# Altium PCB PCB2.PcbDoc
Units mm, origin at the board's own origin, x right, y up, seen from the top; angles counter-clockwise.
Board outline 41 x 58.5 mm, 2 copper layers (Top Layer, Bottom Layer); 36 components, 22 nets, 143 pads, 0 vias.
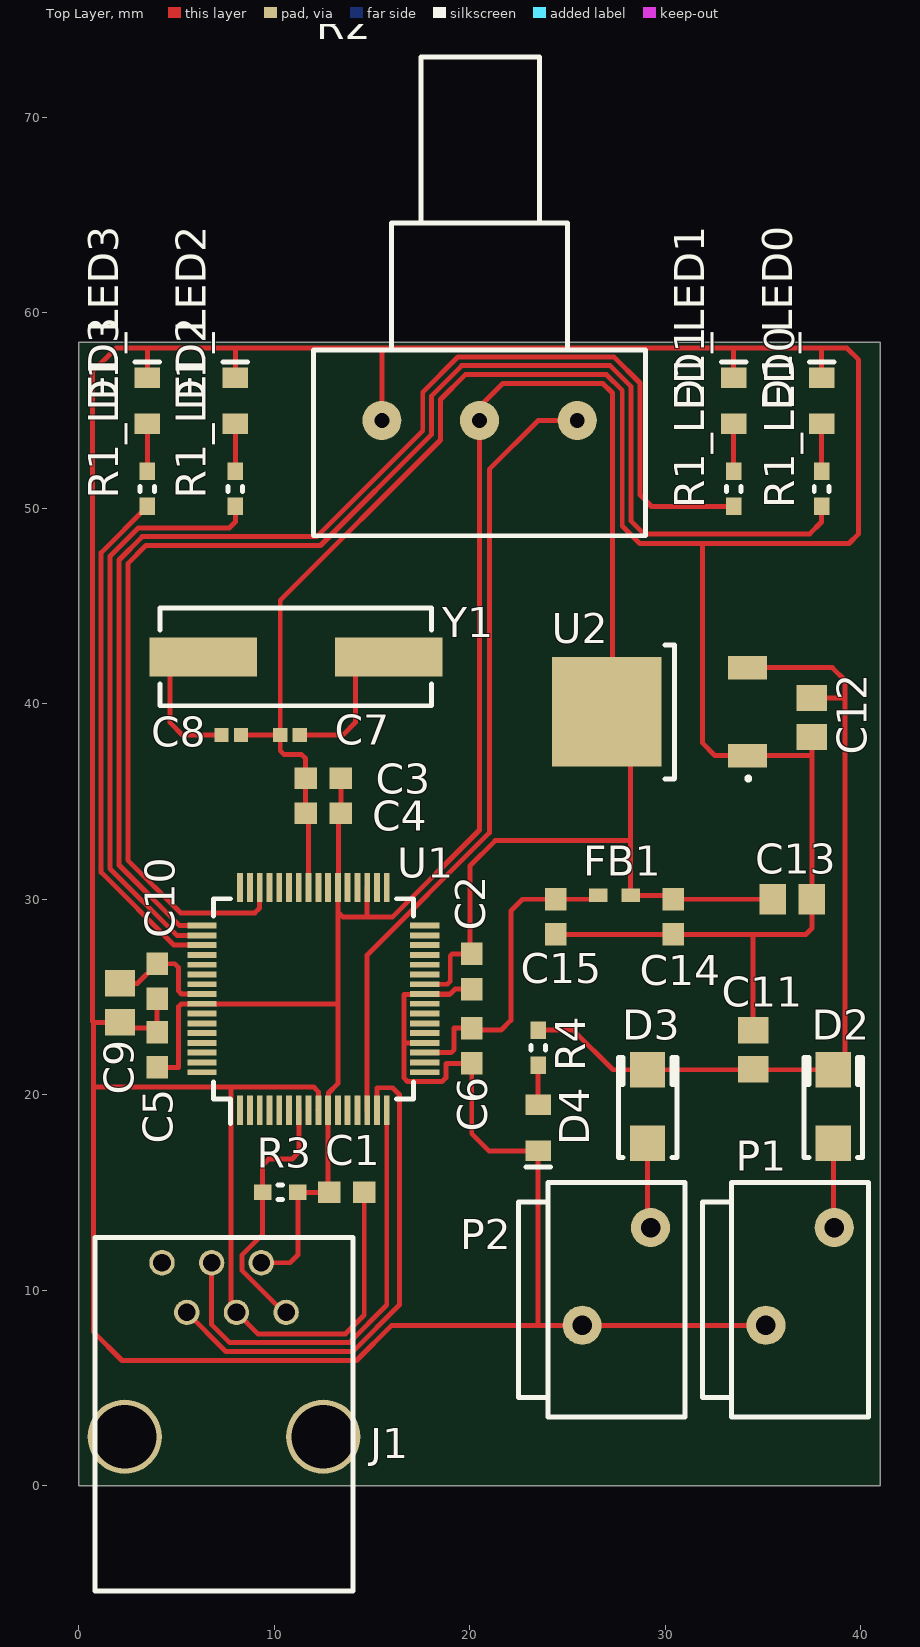
[diagram p0: Top Layer view]
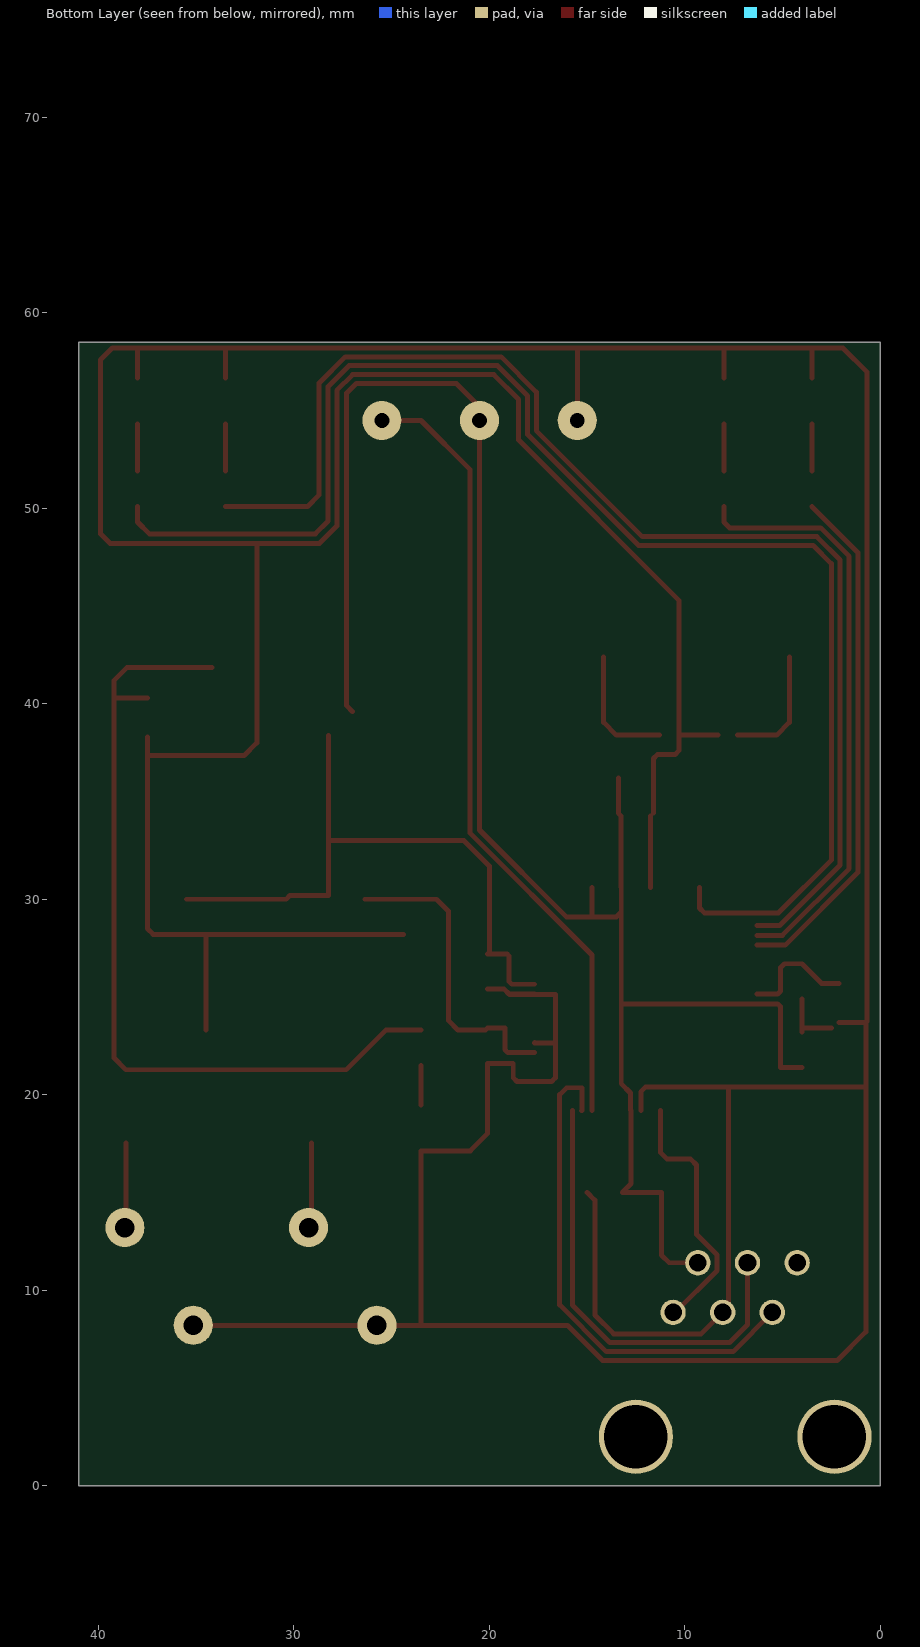
[diagram p1: Bottom Layer view, seen from below]

## Layer stack, top to bottom
Top Solder: solder mask 0.0102, Solder Resist, Dk 3.5
Top Layer: signal copper 0.0356
Dielectric 1: dielectric 0.32, FR-4, Dk 4.8
Bottom Layer: signal copper 0.0356
Bottom Solder: solder mask 0.0102, Solder Resist, Dk 3.5

## Board outline
0,0 41,0 41,58.5 0,58.5

## Design rules (kind name [scope] priority, off if disabled: settings)
Clearance [All] p1: gap=0.2
HoleSize [All] p1: absolutevalues=TRUE maxlimit=2.54 minlimit=0.3 maxpercent=80.000 minpercent=20.000
PolygonConnect [All] p1: connectstyle=Relief reliefconductorwidth=0.254 reliefentries=4 polygonreliefangle="90 Angle" airgapwidth=0.254
RoutingVias [All] p1: holewidth=0.711 width=1.27 viastyle="Through Hole" minholewidth=0.3 minwidth=0.7 maxholewidth=0.711 maxwidth=1.27
SolderMaskExpansion [All] p1: expansion=0.102
UnpouredPolygon [All] p1: allowunpoured=FALSE
Width [All] p1: maxlimit=0.254 minlimit=0.2 preferedwidth=0.2
28 further rules are at their usual default settings.

## Classes and differential pairs
component class "Components Class 1": C8 U1
channel class LED: LED0 LED1 LED2 LED3
net class LED[0..3]: LED0 LED1 LED2 LED3
component class POWER: C11 C12 C13 C14 C15 D2 D3 D4 FB1 P1 P2 R4 U2
component class PIC: C1 C2 C3 C4 C5 C6 C7 C8 C9 C10 J1 R3 U1 Y1
component class LED3: D1_LED3 R1_LED3
component class LED2: D1_LED2 R1_LED2
component class LED1: D1_LED1 R1_LED1
component class LED0: D1_LED0 R1_LED0

## Components (designator, comment, footprint, x,y, rotation, side; value= is the part's Value field where it differs from the comment)
C1 "100nF" CAPC1608N 13.7,15 r180 top
C2 "100nF" CAPC1608N 20.1,26.3 r90 top
C3 "100nF" CAPC1608N 12.5,36.2 r0 top
C4 "100nF" CAPC1608N 12.5,34.4 r0 top
C5 "100nF" CAPC1608N 4,22.3 r270 top
C6 "100nF" CAPC1608N 20.1,22.5 r90 top
C7 "20pF" CAPC1005N 10.8,38.4 r180 top
C8 "20pF" CAPC1005N 7.8,38.4 r0 top
C9 "10uF" CAPC2012N 2.1,24.7 r90 top
C10 "1uF" CAPC1608N 4,25.8 r90 top
C11 "10uF" CAPC2012N 34.5,22.3 r270 top
C12 "10uF" CAPC2012N 37.5,39.3 r90 top
C13 "10uF" CAPC2012N 36.5,30 r180 top
C14 "1uF" CAPC1608N 30.4,29.1 r90 top
C15 "100nF" CAPC1608N 24.4,29.1 r90 top
D1_LED0 "Green LED" "LED 0805" 38,55.5 r90 top (schematic designator D1)
D1_LED1 "Green LED" "LED 0805" 33.5,55.5 r90 top (schematic designator D1)
D1_LED2 "Green LED" "LED 0805" 8,55.5 r90 top (schematic designator D1)
D1_LED3 "Green LED" "LED 0805" 3.5,55.5 r90 top (schematic designator D1)
D2 "GF1A" SMA/DO-214AC_21 38.6,19.4 r90 top
D3 "GF1A" SMA/DO-214AC_21 29.1,19.4 r90 top
D4 "Green LED" "LED 0805" 23.5,18.3 r270 top
FB1 "600r" INDC1608AN 27.4,30.2 r180 top
J1 "Program / Debug" "RJ12_90  1-215876-3" 12.5,2.5 r270 top
P1 "12V Main" PHOENIX_1985195 36.9,10.7 r0 top
P2 "12V Battery" PHOENIX_1985195 27.5,10.7 r0 top
R1_LED0 "330r" RESC1608N 38,51 r270 top (schematic designator R1)
R1_LED1 "330r" RESC1608N 33.5,51 r270 top (schematic designator R1)
R1_LED2 "330r" RESC1608N 8,51 r270 top (schematic designator R1)
R1_LED3 "330r" RESC1608N 3.5,51 r270 top (schematic designator R1)
R2 "1K" PDB181-K415K-102A2 20.5,54.5 r0 top
R3 "4.7k" RESC1608N 10.3,15 r0 top
R4 "470r" RESC1608N 23.5,22.4 r90 top
U1 "PIC32MX764F128H-I/PT" QFP50P1200X1200X120-64 12,24.9 r90 top
U2 "AP1117" TD03B_N 27,39.6 r90 top
Y1 "8MHz" "HC49/4H SMX CRYSTAL" 11.1,42.4 r0 top

## Footprints (in the part's own frame and the unit in brackets; to place one, negate y for a bottom-side part, rotate by r counter-clockwise, add the part's x,y. Pads: shape width x height; smd on the part's side, far side on the other; paste and mask are expansions set on the pad)
CAPC1005N [mm]
  rect 0.72x0.72 smd: 1(-0.5,0) 2(0.5,0)
CAPC1608N [mm]
  rect 1.15x1.1 smd: 1(-0.9,0) 2(0.9,0)
CAPC2012N [mm]
  rect 1.35x1.55 smd: 1(-1,0) 2(1,0)
"HC49/4H SMX CRYSTAL" [mm]
  rect 5.5x2 smd: 1(-4.75,0) 2(4.75,0)
  silkscreen extent -6.95,-2.5 6.95,2.5
INDC1608AN [mm]
  rect 0.95x0.7 smd: 1(-0.825,0) 1(-0.825,0) 2(0.825,0)
"LED 0805" [mm]
  rect 1.05x1.3 smd: 1(-1.175,0) 2(1.175,0)
  silkscreen extent 2,-0.63 2,0.63
PDB181-K415K-102A2 [mm]
  round 2 hole 0.762: 1(-5,0) 2(0,0) 3(5,0)
  silkscreen extent -8.5,-5.9 8.5,18.6
PHOENIX_1985195 [mm]
  round 2 hole 1: 1(1.75,2.5) 2(-1.75,-2.5)
  silkscreen extent -5,-7.2 3.5,4.8
QFP50P1200X1200X120-64 [mm]
  rect 1.5x0.3 smd: 1(-5.7,3.75) 2(-5.7,3.25) 3(-5.7,2.75) 4(-5.7,2.25) 5(-5.7,1.75) 6(-5.7,1.25) 7(-5.7,0.75) 8(-5.7,0.25) 9(-5.7,-0.25) 10(-5.7,-0.75) 11(-5.7,-1.25) 12(-5.7,-1.75) 13(-5.7,-2.25) 14(-5.7,-2.75) 15(-5.7,-3.25) 16(-5.7,-3.75) 33(5.7,-3.75) 34(5.7,-3.25) 35(5.7,-2.75) 36(5.7,-2.25) 37(5.7,-1.75) 38(5.7,-1.25) 39(5.7,-0.75) 40(5.7,-0.25) 41(5.7,0.25) 42(5.7,0.75) 43(5.7,1.25) 44(5.7,1.75) 45(5.7,2.25) 46(5.7,2.75) 47(5.7,3.25) 48(5.7,3.75)
  rect 0.3x1.5 smd: 17(-3.75,-5.7) 18(-3.25,-5.7) 19(-2.75,-5.7) 20(-2.25,-5.7) 21(-1.75,-5.7) 22(-1.25,-5.7) 23(-0.75,-5.7) 24(-0.25,-5.7) 25(0.25,-5.7) 26(0.75,-5.7) 27(1.25,-5.7) 28(1.75,-5.7) 29(2.25,-5.7) 30(2.75,-5.7) 31(3.25,-5.7) 32(3.75,-5.7) 49(3.75,5.7) 50(3.25,5.7) 51(2.75,5.7) 52(2.25,5.7) 53(1.75,5.7) 54(1.25,5.7) 55(0.75,5.7) 56(0.25,5.7) 57(-0.25,5.7) 58(-0.75,5.7) 59(-1.25,5.7) 60(-1.75,5.7) 61(-2.25,5.7) 62(-2.75,5.7) 63(-3.25,5.7) 64(-3.75,5.7)
  silkscreen extent -6.38,-5.13 5.13,5.13
RESC1608N [mm]
  rect 0.9x0.8 smd: 1(-0.9,0) 2(0.9,0)
  silkscreen extent -0.13,-0.38 0.13,0.38
"RJ12_90  1-215876-3" [mm]
  round 1.3 hole 0.9: 1(-6.36,-1.9) 2(-8.9,-3.17) 3(-6.36,-4.44) 4(-8.9,-5.71) 5(-6.36,-6.98) 6(-8.9,-8.25)
  round 3.8 hole 3.25: 11(0,0) 11(0,-10.16)
  silkscreen extent -10.2,-11.68 7.9,1.52
SMA/DO-214AC_21 [mm]
  rect 1.82x1.8 smd: 1(-1.875,0) 2(1.875,0)
  silkscreen extent -2.63,-1.5 2.5,1.5
TD03B_N [mm]
  rect 1.2x2 smd: 1(-2.25,-7.2) 3(2.25,-7.2)
  rect 5.6x5.6 smd: 2(0,0)
  silkscreen extent -3.5,-7.33 3.4,-3

## Part data
C1 C2 C3 C4 C5 C6 C7 C8 C9 C10 C11 C12 C13 C14 C15: library part Cap, "Capacitor"
D1_LED0 D1_LED1 D1_LED2 D1_LED3: library part LED0, "Typical INFRARED GaAs LED"
D2 D3: library part Diode, "Default Diode"
D4: library part LED2, "Typical RED, GREEN, YELLOW, AMBER GaAs LED"
FB1: library part Inductor, "Inductor"
J1: library part "Header 6", "Header, 6-Pin"
P1 P2: library part "Header 2", "Header, 2-Pin"
R1_LED0 R1_LED1 R1_LED2 R1_LED3 R3 R4: library part Res1, "Resistor"
R2: library part RPot, "Potentiometer"
U1: "PIC32MX764F128H"
U2: "1A LDO, 18V input, DPAK"
Y1: library part XTAL, "Crystal Oscillator"

## Nets (pads, with @x,y where several pads share a name; then routed paths per layer and width w, separated by ;. In a path a pad name is that pad's centre, name@x,y a point inside that pad or via, vN(x,y) a via of type N, cw(c..) or ccw(c..) an arc to the next point about the centre after c; other vN are vias at no path point)
ALIM: D2.1 P1.1 | length 4.3
  Top Layer w0.254: P1.1@38.6,13.25 D2.1
BATTERY: D3.1 P2.1 | length 4.4
  Top Layer w0.254: D3.1 29.1,13.35 P2.1
GND: C1.1 C2.1 C3.1 C4.1 C5.1 C6.1 C7.2 C8.2 C9.1 C10.1 C11.1 C12.1 C13.1 C14.1 C15.1 D1_LED0.2 D1_LED1.2 D1_LED2.2 D1_LED3.2 D4.2 J1.3 P1.2 P2.2 R2.1 U1.9 U1.20 U1.25 U1.41 U2.1 | length 328
  Top Layer w0.254: 0.8,20.4 7.8,20.4 ; C9.1 0.738,23.7 ; C9.1@2.5,23.4 C5.1@3.9,23.4 ; D1_LED3.2 3.5,58.2 ; C5.1 C10.1 ; J1.3@7.899,8.86 J1.3 ; D1_LED2.2 8,58.2 ; C8.2 C7.2 ; C4.1 C3.1 11.6,37.2 11.4,37.4 10.5,37.4 10.3,37.6 C7.2 ; U1.41 C4.1@11.75,34.25 ; U1.9@12.227,19.223 U1.9 12.25,20.15 12,20.4 7.8,20.4 ; C1.1@15,15 14.6,14.6 14.6,8.726 13.636,7.762 9.158,7.762 J1.3 ; 16.673,22.65 U1.20 U1.20@17.677,22.673 ; U1.25 18.992,25.15 19.242,25.4 C2.1 ; 18.969,25.127 16.623,25.127 16.623,20.865 16.815,20.673 18.585,20.673 18.777,20.865 18.777,21.582 18.795,21.6 C6.1 20.1,18 20.975,17.125 D4.2 23.5,8.2 P2.2 ; C15.1 C14.1 34.5,28.2 ; 31.9,48.2 31.9,38 32.55,37.35 U2.1 37.5,37.35 ; D1_LED1.2 33.5,58.108 ; C11.1 34.5,28.2 ; P1.2 P2.2 ; C12.1 C13.1 37.5,28.5 37.2,28.2 34.5,28.2 ; D1_LED0.2 38,58.208 ; 0.738,23.7 0.738,7.862 2.2,6.4 14.2,6.4 16,8.2 P2.2 ; 0.738,23.7 0.684,23.754 0.684,56.984 1.9,58.2 3.5,58.2 ; 3.5,58.2 8,58.2 ; 7.8,20.4 7.773,20.373 7.773,9.147 J1.3 ; 8,58.2 15.5,58.2 R2.1 15.5,58.208 38,58.208 ; C7.2 10.3,45.3 18.5,53.5 18.5,55.574 19.772,56.846 26.996,56.846 27.8,56.042 27.8,49.1 28.7,48.2 39.4,48.2 39.9,48.7 39.9,57.6 39.292,58.208 38,58.208
LED0: R1_LED0.2 U1.46 | length 73.7
  Top Layer w0.254: U1.46 9.25,29.55 9,29.3 5.2,29.3 2.5,32 2.5,47.174 3.426,48.1 12.358,48.1 18.046,53.788 18.046,55.762 19.584,57.3 27.184,57.3 28.254,56.23 28.254,49.346 28.9,48.7 37.4,48.7 38,49.3 R1_LED0.2
LED1: R1_LED1.2 U1.49 | length 64.6
  Top Layer w0.254: U1.49 5.15,28.65 2.046,31.754 2.046,47.362 3.238,48.554 12.17,48.554 17.592,53.976 17.592,55.95 19.396,57.754 27.372,57.754 28.708,56.418 28.708,50.692 29.3,50.1 R1_LED1.2
LED2: R1_LED2.2 U1.50 | length 30
  Top Layer w0.254: U1.50 5.008,28.15 1.592,31.566 1.592,47.55 3.05,49.008 7.708,49.008 8,49.3 R1_LED2.2
LED3: R1_LED3.2 U1.51 | length 26.4
  Top Layer w0.254: R1_LED3.2 1.138,47.738 1.138,31.378 4.866,27.65 U1.51
MCLR: J1.1 R3.1 U1.7 | length 13.2
  Top Layer w0.254: J1.1 10.488,8.86 8.353,10.995 8.353,11.805 9.4,12.852 R3.1 9.4,16.4 9.7,16.7 10.9,16.7 11.25,17.05 U1.7
NetC9_2: C9.2 C10.2 U1.56 | length 6
  Top Layer w0.254: C9.2 3,25.7 C10.2 4.9,26.7 5.1,26.5 5.1,25.3 5.25,25.15 U1.56
NetD1_LED0_1: D1_LED0.1 R1_LED0.1 | length 2.4
  Top Layer w0.254: R1_LED0.1 D1_LED0.1
NetD1_LED1_1: D1_LED1.1 R1_LED1.1 | length 2.4
  Top Layer w0.254: R1_LED1.1 D1_LED1.1
NetD1_LED2_1: D1_LED2.1 R1_LED2.1 | length 2.4
  Top Layer w0.254: R1_LED2.1 D1_LED2.1
NetD1_LED3_1: D1_LED3.1 R1_LED3.1 | length 2.4
  Top Layer w0.254: R1_LED3.1 D1_LED3.1
NetD4_1: D4.1 R4.1 | length 2
  Top Layer w0.254: D4.1 R4.1
NetR2_3: R2.3 U1.14 | length 40.9
  Top Layer w0.254: U1.14 14.75,27.15 21,33.4 21,52 23.5,54.5 R2.3
PGC: J1.5 U1.15 | length 25.9
  Top Layer w0.254: J1.5 7.526,6.854 14.012,6.854 16.4,9.242 16.4,20 16.046,20.354 15.25,20.354 U1.15 U1.15@15.273,19.177
PGD: J1.4 U1.16 | length 23.3
  Top Layer w0.254: J1.4 6.79,8.232 7.714,7.308 13.824,7.308 15.75,9.234 U1.16
V3P3: C1.2 C2.2 C3.2 C4.2 C5.2 C13.2 C14.2 FB1.1 J1.2 R2.2 R3.2 U1.10 U1.26 U1.35 U1.38 U1.57 U2.2 | length 130.1
  Top Layer w0.254: C5.2 5.1,21.4 5.1,24.5 5.25,24.65 U1.57 13.2,24.65 13.25,24.7 ; J1.2 10.8,11.4 11.2,11.8 R3.2 13.2,15 12.75,15.45 U1.10 12.773,19.223 12.773,20.085 13.25,20.562 13.25,24.7 ; C3.2 C4.2 13.273,34.273 13.273,30.623 U1.38 13.25,29.35 ; U1.35 14.75,29.1 ; U1.26 18.85,25.65 19,25.8 19,27.1 19.1,27.2 C2.2 ; C2.2@20,27.3 20,31.7 21.3,33 28.225,33 ; U2.2 27.3,39.9 27.3,55.9 26.808,56.392 21.692,56.392 20.5,55.2 R2.2 20.5,33.542 16.058,29.1 14.75,29.1 ; U2.2@28.225,38.375 28.225,30.2 30.2,30.2 C14.2 C13.2 ; 13.25,24.7 13.25,29.35 ; 13.25,29.35 13.5,29.1 14.75,29.1
V3P3A: C6.2 C15.2 FB1.2 U1.19 | length 15.8
  Top Layer w0.254: U1.19 19.05,22.15 19.2,22.3 19.2,23.4 C6.2 ; C6.2@20.2,23.3 21.6,23.3 22.1,23.8 22.1,29.4 22.7,30 C15.2 FB1.2@26.375,30
V5: C11.2 C12.2 D2.2 D3.2 R4.2 U2.3 | length 43.2
  Top Layer w0.254: R4.2 25.3,23.3 27.325,21.275 D3.2 D2.2 39.2,21.875 39.2,40.4 ; U2.3 38.55,41.85 39.2,41.2 39.2,40.3 C12.2
X1: C7.1 Y1.2 | length 6.5
  Top Layer w0.254: C7.1 13.5,38.4 14.15,39.05 Y1.2@14.15,42.4
X2: C8.1 Y1.1 | length 6.3
  Top Layer w0.254: Y1.1@4.65,42.4 4.65,39.05 5.3,38.4 C8.1
pads on no net: J1.6 J1.11 U1.1 U1.2 U1.3 U1.4 U1.5 U1.6 U1.8 U1.11 U1.12 U1.13 U1.17 U1.18 U1.21 U1.22 U1.23 U1.24 U1.27 U1.28 U1.29 U1.30 U1.31 U1.32 U1.33 U1.34 U1.36 U1.37 U1.39 U1.40 U1.42 U1.43 U1.44 U1.45 U1.47 U1.48 U1.52 U1.53 U1.54 U1.55 U1.58 U1.59 U1.60 U1.61 U1.62 U1.63 U1.64